# Altium PCB PCB_Curso_Octubre.PcbDoc
Units mm, origin at the board's own origin, x right, y up, seen from the top; angles counter-clockwise.
Board outline 35 x 50 mm, 2 copper layers (Top Layer, Bottom Layer); 18 components, 8 nets, 47 pads, 5 vias.
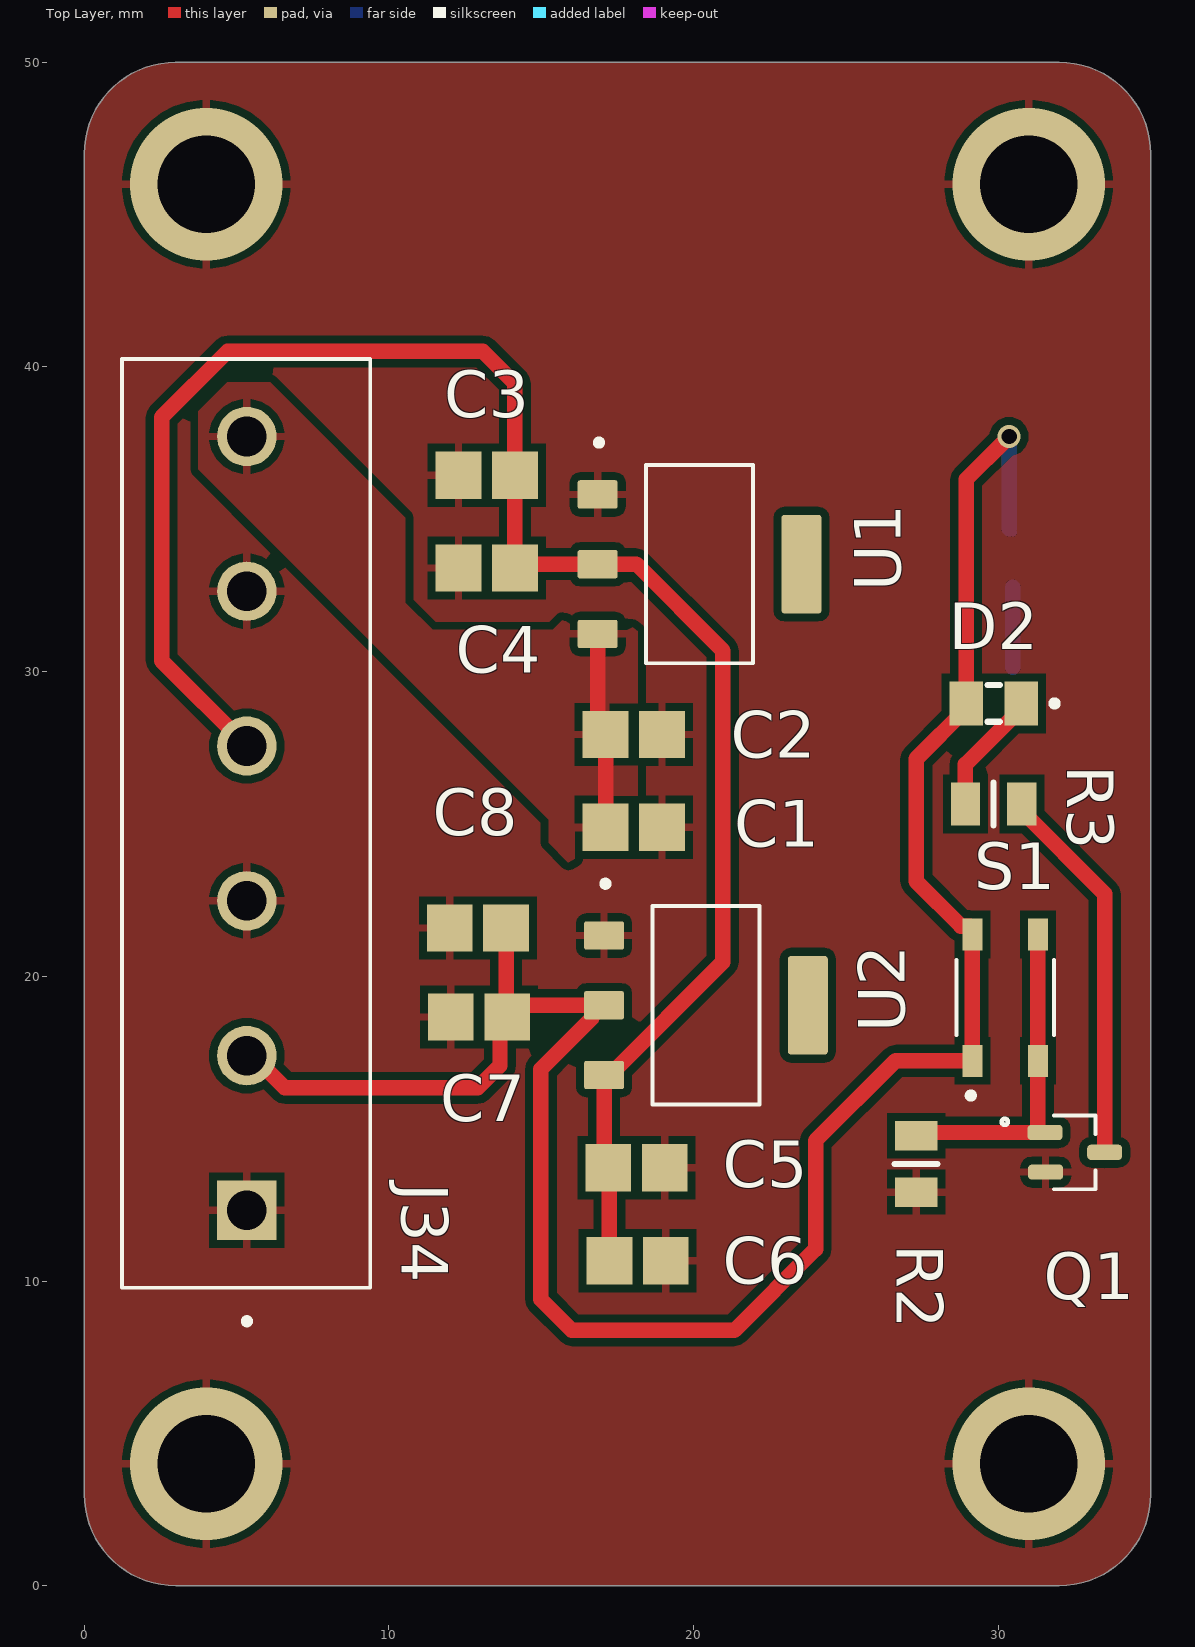
[diagram p0: Top Layer view]
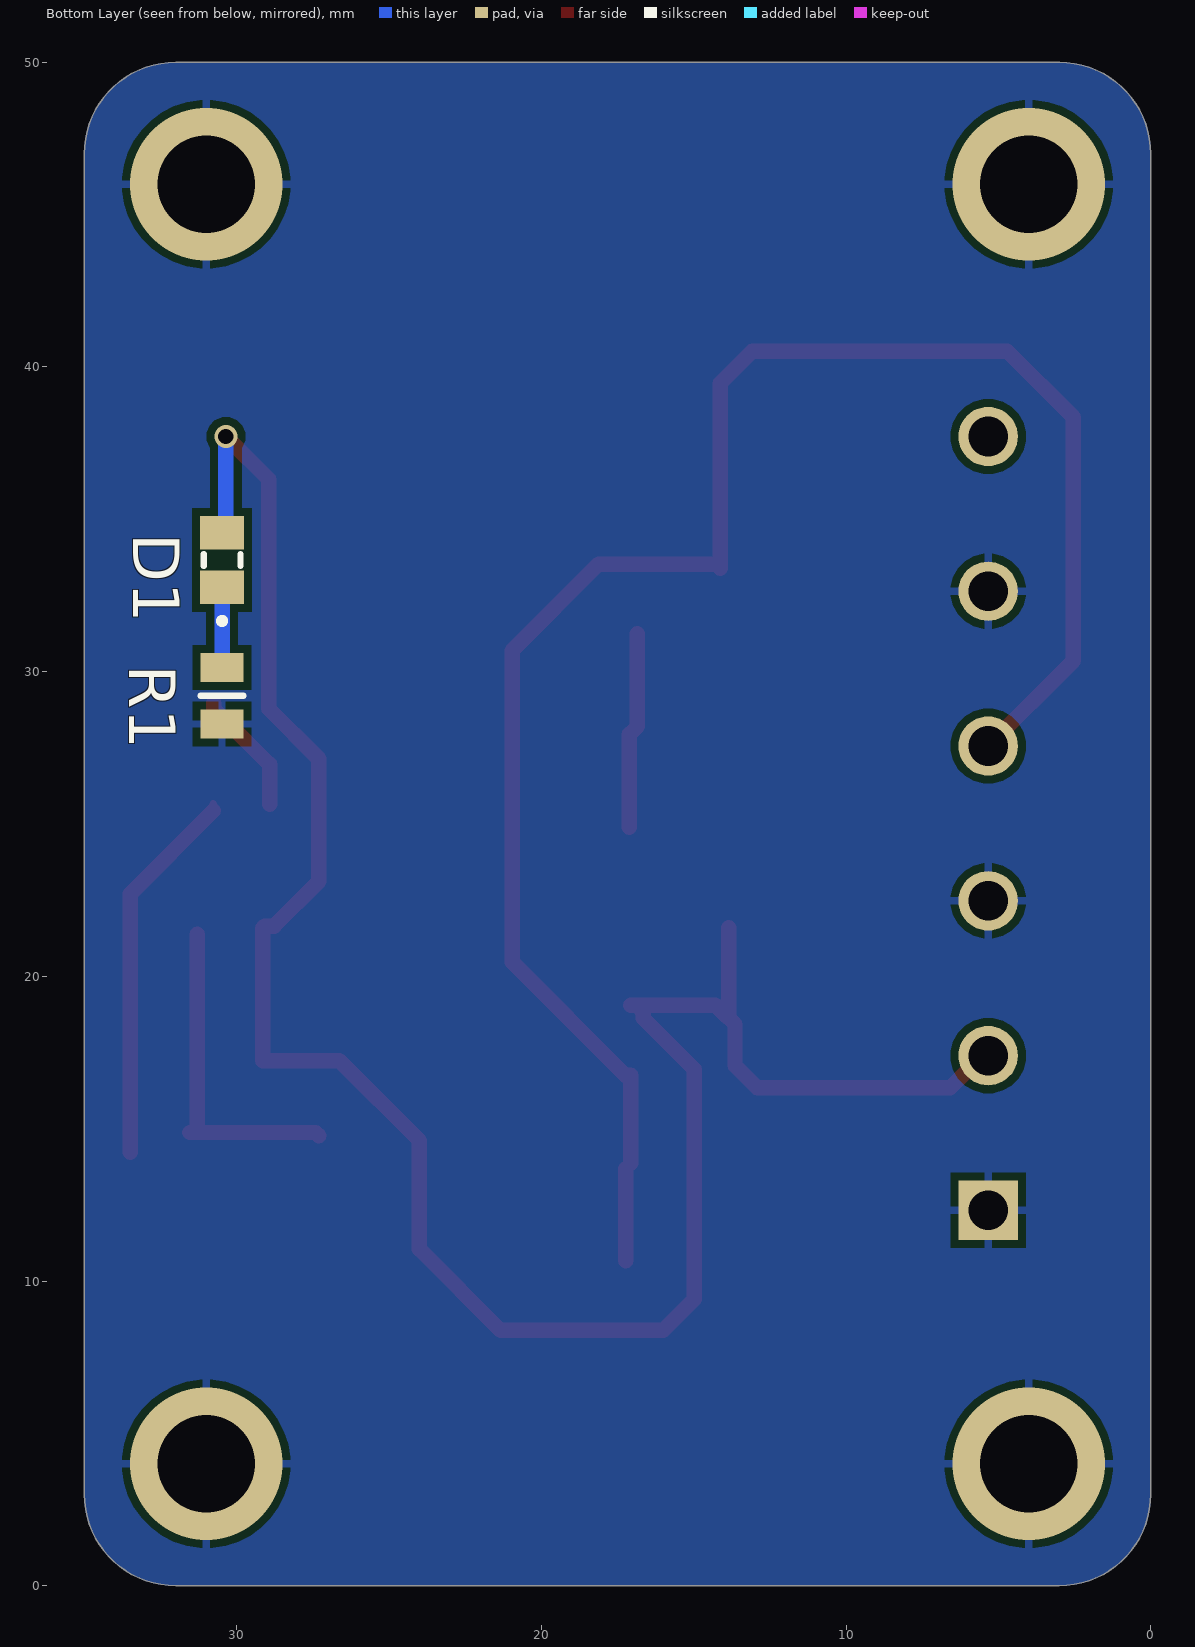
[diagram p1: Bottom Layer view, seen from below]

## Layer stack, top to bottom
Top Solder: solder mask 0.0102, Solder Resist, Dk 3.5
Top Layer: signal copper 0.0356
Dielectric 1: dielectric 0.32, FR-4, Dk 4.8
Bottom Layer: signal copper 0.0356
Bottom Solder: solder mask 0.0102, Solder Resist, Dk 3.5

## Board outline
3,0 cw(c3,3) 0,3 0,47 cw(c3,47) 3,50 32,50 cw(c32,47) 35,47 35,3 cw(c32,3) 32,0

## Design rules (kind name [scope] priority, off if disabled: settings)
Clearance [All] p1: gap=0.254 ignorepadtopadclearanceinfootprint=FALSE
PolygonConnect [All] p1: connectstyle=Relief reliefconductorwidth=0.254 reliefentries=4 polygonreliefangle="90 Angle" airgapwidth=0.254
RoutingVias [All] p1: holewidth=0.711 width=1.27 viastyle="Through Hole" minholewidth=0.711 minwidth=1.27 maxholewidth=0.711 maxwidth=1.27
SolderMaskExpansion [All] p1: expansion=0 istentingtop=FALSE
SupplyNets "Schematic Supply Nets" [InNet('GND')] p1: voltage=0.000
Width [All] p1: maxlimit=0.254 minlimit=0.254 preferedwidth=0.254
30 further rules are at their usual default settings.

## Classes and differential pairs
component class PCB_Curso_Octubre: C1 C2 C3 C4 C5 C6 C7 C8 D1 D2 J34 Q1 R1 R3 S1 U1 U2

## Components (designator, comment, footprint, x,y, rotation, side; value= is the part's Value field where it differs from the comment)
C1 "10uF" CAPC2013X145X48ML20T23 18.034,24.892 r0 top
C2 "100nF" CAPC2013X145X48ML20T23 18.034,27.94 r0 top
C3 "10uf" CAPC2013X145X48ML20T23 13.208,36.449 r180 top
C4 "100nF" CAPC2013X145X48ML20T23 13.208,33.401 r180 top
C5 "10uF" CAPC2013X145X48ML20T23 18.125,13.716 r0 top
C6 "100nF" CAPC2013X145X48ML20T23 18.161,10.668 r0 top
C7 "10uF" CAPC2013X145X48ML20T23 12.954,18.669 r180 top
C8 "100nF" CAPC2013X145X48ML20T23 12.918,21.59 r180 top
D1 "LED_Azul" LEDC2012X120N 30.48,33.666 r90 bottom
D2 "LED_Azul" LEDC2012X120N 29.845,28.956 r180 top
J34 "1729160" PHOENIX_1729160 9.384,9.779 r90 top
Q1 "NTS4001NT1G" SOT65P220X100-3N 32.512,14.224 r0 top
R1 "330R" FP-MCU0805-IPC_B 30.48,29.21 r90 bottom
R2 "1k" FP-MCU0805-IPC_B 27.305,13.843 r90 top
R3 "10k" FP-MCU0805-IPC_B 29.845,25.654 r180 top
S1 "SKRPABE010" SW_SKRPABE010 30.226,19.304 r90 top
U1 "AMS1117-5.0" SOT229P700X180-4N 20.193,33.528 r270 top
U2 "AMS1117-3.3" SOT229P700X180-4N 20.404,19.05 r270 top

## Footprints (in the part's own frame and the unit in brackets; to place one, negate y for a bottom-side part, rotate by r counter-clockwise, add the part's x,y. Pads: shape width x height; smd on the part's side, far side on the other; paste and mask are expansions set on the pad)
CAPC2013X145X48ML20T23 [mm] "Chip Capacitor, 2-Leads, Body 2.00x1.25mm, IPC Low Density"
  rect 1.5x1.55 smd: 1(-0.925,0) 2(0.925,0)
  body extent -1.1,-0.72 1.1,0.72, height 1.45
FP-MCU0805-IPC_B [mm]
  rect 0.959x1.408 smd paste+0 mask+0: 1(-0.927,0) 2(0.927,0)
  silkscreen extent 0,-0.7 0,0.7, body extent -1,-0.63 1,0.63, height 0.55
LEDC2012X120N [mm]
  rect 1.1x1.45 smd: A(0.9,0) C(-0.9,0)
  silkscreen extent -2.1,-0.6 0.2,0.6, body extent -1,-0.65 1,0.65, height 0.9
PHOENIX_1729160 [mm]
  rect 1.95x1.95 / inner round 1.95 / far side rect 1.95x1.95 hole 1.3: 1(2.54,4.05)
  round 1.95 hole 1.3: 2(7.62,4.05) 3(12.7,4.05) 4(17.78,4.05) 5(22.86,4.05) 6(27.94,4.05)
  silkscreen extent -1.2,0 30.48,8.15
SOT65P220X100-3N [mm]
  rrect50% 1.15x0.5 smd: 1(-0.98,0.65) 2(-0.96,-0.65) 3(0.98,0)
  silkscreen extent -2.4,-1.21 0.68,1.21
SOT229P700X180-4N [mm]
  rrect15% 0.93x1.31 smd: 1(-2.29,-3.345) 2(0,-3.345) 3(2.29,-3.345)
  rrect15% 3.24x1.31 smd: 4(0,3.345)
  silkscreen extent -4.09,-3.4 3.25,1.75, body extent -3.25,-3.5 3.25,3.5, height 1.8
SW_SKRPABE010 [mm]
  rect 1.05x0.65 smd: 1(-2.075,1.075) 2(2.075,1.075) 3(-2.075,-1.075) 4(2.075,-1.075)
  silkscreen extent -3.32,-1.6 1.23,1.6, body extent -2.3,-1.6 2.3,1.6, height 2.5

## Part data
C1 C2 C3 C4 C5 C6 C7 C8: library part CMP-2007-03205-1, Manufacturer=Vitramon, Part Number=VJ0805Y682KXAMT
D1 D2: library part SML-LXT0805IW-TR, "LED;Red;11mcd;0.061In.Dia.;SMD;100mA;2V Vf;635nm;140deg;SMD;White Diffused;5V Vr", Package="0805 Lumex", Check_prices=https://www.snapeda.com/parts/SML-LXT0805IW-TR/Lumex+Opto%252FComponents+Inc./view-part/?ref=eda, MF="Lumex Opto/Components", MP=SML-LXT0805IW-TR, SnapEDA_Link=https://www.snapeda.com/parts/SML-LXT0805IW-TR/Lumex+Opto%252FComponents+Inc./view-part/?ref=snap
J34: "PCB Terminal Screw 5.08mm 16AWG 400V 13.5A 6 Position COMBICON MKDSN Series", Package=None, Check_prices=https://www.snapeda.com/parts/1729160/Phoenix+Contact/view-part/?ref=eda, MF="Phoenix Contact", MP=1729160, SnapEDA_Link=https://www.snapeda.com/parts/1729160/Phoenix+Contact/view-part/?ref=snap
Q1: "N-Channel 30V 270mA _Ta_ 330mW _Ta_ Surface Mount SC-70-3 _SOT323_", Package="SC-70 ON Semiconductor", Availability=Unavailable, MF="ON Semiconductor", MP=NTS4001NT1G, Price=None, SnapEDA_Link=https://www.snapeda.com/parts/NTS4001NT1G/ON%20Semiconductor/view-part/274588/?ref=snap
R1 R2 R3: library part CMP-02407-001108-1, "RES 1.05K OHM 0.5% 1/5W 0805", Case Code (Imperial)=0805, Case Code (Metric)=2012, Max Operating Temperature=155°C, Max Power Dissipation=200mW, Min Operating Temperature=-55°C, Package Quantity=1000, Resistance=51.1kR, Temperature Coefficient=25ppm/°C, Tolerance=0.1%, Voltage Rating=150V, Case/Package=0805, Composition="Thin Film", Features="Automotive AEC-Q200", Height=0.024inch, Length=0.079inch, Number of Terminations=2, Packaging="Tape and Reel", Power Rating=200mW, Termination=SMD/SMT, Weight=0.000162oz, Width=0.049inch
S1: "Switch Tactile N.O. SPST Button J-Bend 0.05A 16VDC 1.57N SMD Automotive T/R", Package=None, Check_prices=https://www.snapeda.com/parts/SKRPABE010/ALPS/view-part/?ref=eda, MF=ALPS, MP=SKRPABE010, SnapEDA_Link=https://www.snapeda.com/parts/SKRPABE010/ALPS/view-part/?ref=snap
U1: "1A LOW DROPOUT VOLTAGE REGULATOR", Package="SOT-223 Seeed Technology", Availability="Not in stock", Check_prices=https://www.snapeda.com/parts/AMS1117-5.0/ams/view-part/?ref=eda, MF=ams, MP=AMS1117-5.0, Price=None, SnapEDA_Link=https://www.snapeda.com/parts/AMS1117-5.0/ams/view-part/?ref=snap
U2: library part AMS1117-5.0, "1A LOW DROPOUT VOLTAGE REGULATOR", Package="SOT-223 Seeed Technology", Availability="Not in stock", Check_prices=https://www.snapeda.com/parts/AMS1117-5.0/ams/view-part/?ref=eda, MF=ams, MP=AMS1117-5.0, Price=None, SnapEDA_Link=https://www.snapeda.com/parts/AMS1117-5.0/ams/view-part/?ref=snap

## Via types
v1: diameter 5, hole 3.2, Top Layer to Bottom Layer, 4 vias
v2: diameter 0.762, hole 0.508, Top Layer to Bottom Layer, 1 vias

## Nets (pads, with @x,y where several pads share a name; then routed paths per layer and width w, separated by ;. In a path a pad name is that pad's centre, name@x,y a point inside that pad or via, vN(x,y) a via of type N, cw(c..) or ccw(c..) an arc to the next point about the centre after c; other vN are vias at no path point)
3v3: C7.1 C8.1 D1.A D2.A J34.2 S1.1 S1.2 U2.2 | length 73.7
  Top Layer w0.508: J34.2 5.517,17.399 6.58,16.336 12.907,16.336 13.643,17.072 13.643,18.433 C7.1 ; C8.1 13.843,18.705 C7.1 ; C7.1@13.891,18.681 C7.1 ; C7.1@13.903,18.669 14.284,19.05 U2.2 ; U2.2@16.845,19.026 16.658,18.839 16.658,18.626 14.986,16.954 14.986,9.398 16.002,8.382 21.336,8.382 24.003,11.049 24.003,14.605 26.627,17.229 S1.1 29.151,21.579 29.08,21.65 28.769,21.65 27.305,23.114 27.305,27.141 28.945,28.781 28.945,36.311 30.226,37.592 30.353,37.592 v2(30.353,37.719)
  Bottom Layer w0.254: D1.A@30.353,34.693 D1.A
  Bottom Layer w0.508: D1.A@30.353,34.693 v2(30.353,37.719)
5v: C3.1 C4.1 C5.1 C6.1 J34.4 U1.2 U2.3 | length 60.8
  Top Layer w0.254: C5.1@17.059,13.857 C5.1 C5.1@17.236,13.68
  Top Layer w0.508: J34.4 2.54,30.353 2.54,38.354 4.699,40.513 13.081,40.513 14.133,39.461 C3.1 C4.1 14.26,33.528 U1.2 18.117,33.528 20.955,30.69 20.955,20.466 17.249,16.76 U2.3 C5.1@17.059,13.857 ; C6.1 C5.1@17.236,13.68
GND: C1.2 C2.2 C3.2 C4.2 C5.2 C6.2 C7.2 C8.2 J34.1 J34.3 J34.5 Q1.2 R1.1 R2.1 U1.1 U2.1
  other v1: 4,4 31,4 4,46 31,46
NetD1_C: D1.C R1.2 | length 2.6
  Bottom Layer w0.508: R1.2 D1.C
NetD2_C: D2.C R3.2 | length 4.1
  Top Layer w0.508: R3.2 28.918,26.954 30.745,28.781 D2.C
NetQ1_1: Q1.1 R2.2 S1.3 S1.4 | length 10.9
  Top Layer w0.508: R2.2 27.409,14.874 Q1.1 31.424,14.874 31.301,14.997 S1.3 S1.4
NetQ1_3: Q1.3 R3.1 | length 12.6
  Top Layer w0.254: R3.1@30.772,25.429 R3.1
  Top Layer w0.508: R3.1@30.772,25.429 33.492,22.709 Q1.3
Vin: C1.1 C2.1 J34.6 U1.3 | length 6.6
  Top Layer w0.508: J34.6 J34.6@5.419,37.634 ; U1.3 16.848,28.201 C2.1 C1.1
pads on no net: U1.4 U2.4

## Polygon pours and split planes (outlines as drawn)
GND on Top Layer "GND_L01_P006" (solid, pour order 6): 3,0 cw(c3,3) 0,3 0,47 cw(c3,47) 3,50 32,50 cw(c32,47) 35,47 35,3 cw(c32,3) 32,0
Vin on Top Layer "VIN_L01_P000" (solid, pour order 0): 15.24,25.146 15.24,24.384 15.875,23.749 17.78,23.749 18.161,24.13 18.161,31.369 17.399,32.131 16.129,32.131 15.367,31.369 11.43,31.369 10.541,32.258 10.541,35.052 6.096,39.497 4.699,39.497 3.746,38.544 3.746,36.639
GND on Bottom Layer "GND_L02_P007" (solid, pour order 7): 3,0 cw(c3,3) 0,3 0,47 cw(c3,47) 3,50 32,50 cw(c32,47) 35,47 35,3 cw(c32,3) 32,0

## Silkscreen, mask and mechanical layers (free items; w line width, h text height)
Mechanical 1:
  the board outline again, w0